# Altium PCB CANnode.PcbDoc
Units mil, origin at the board's own origin, x right, y up, seen from the top; angles counter-clockwise.
Board outline 3938 x 3086.48 mil, 2 copper layers (Top, Bottom), stack 61.811 mil thick; 245 components, 188 nets, 907 pads, 0 vias.
Unrouted connection lines stored in the file: 375.
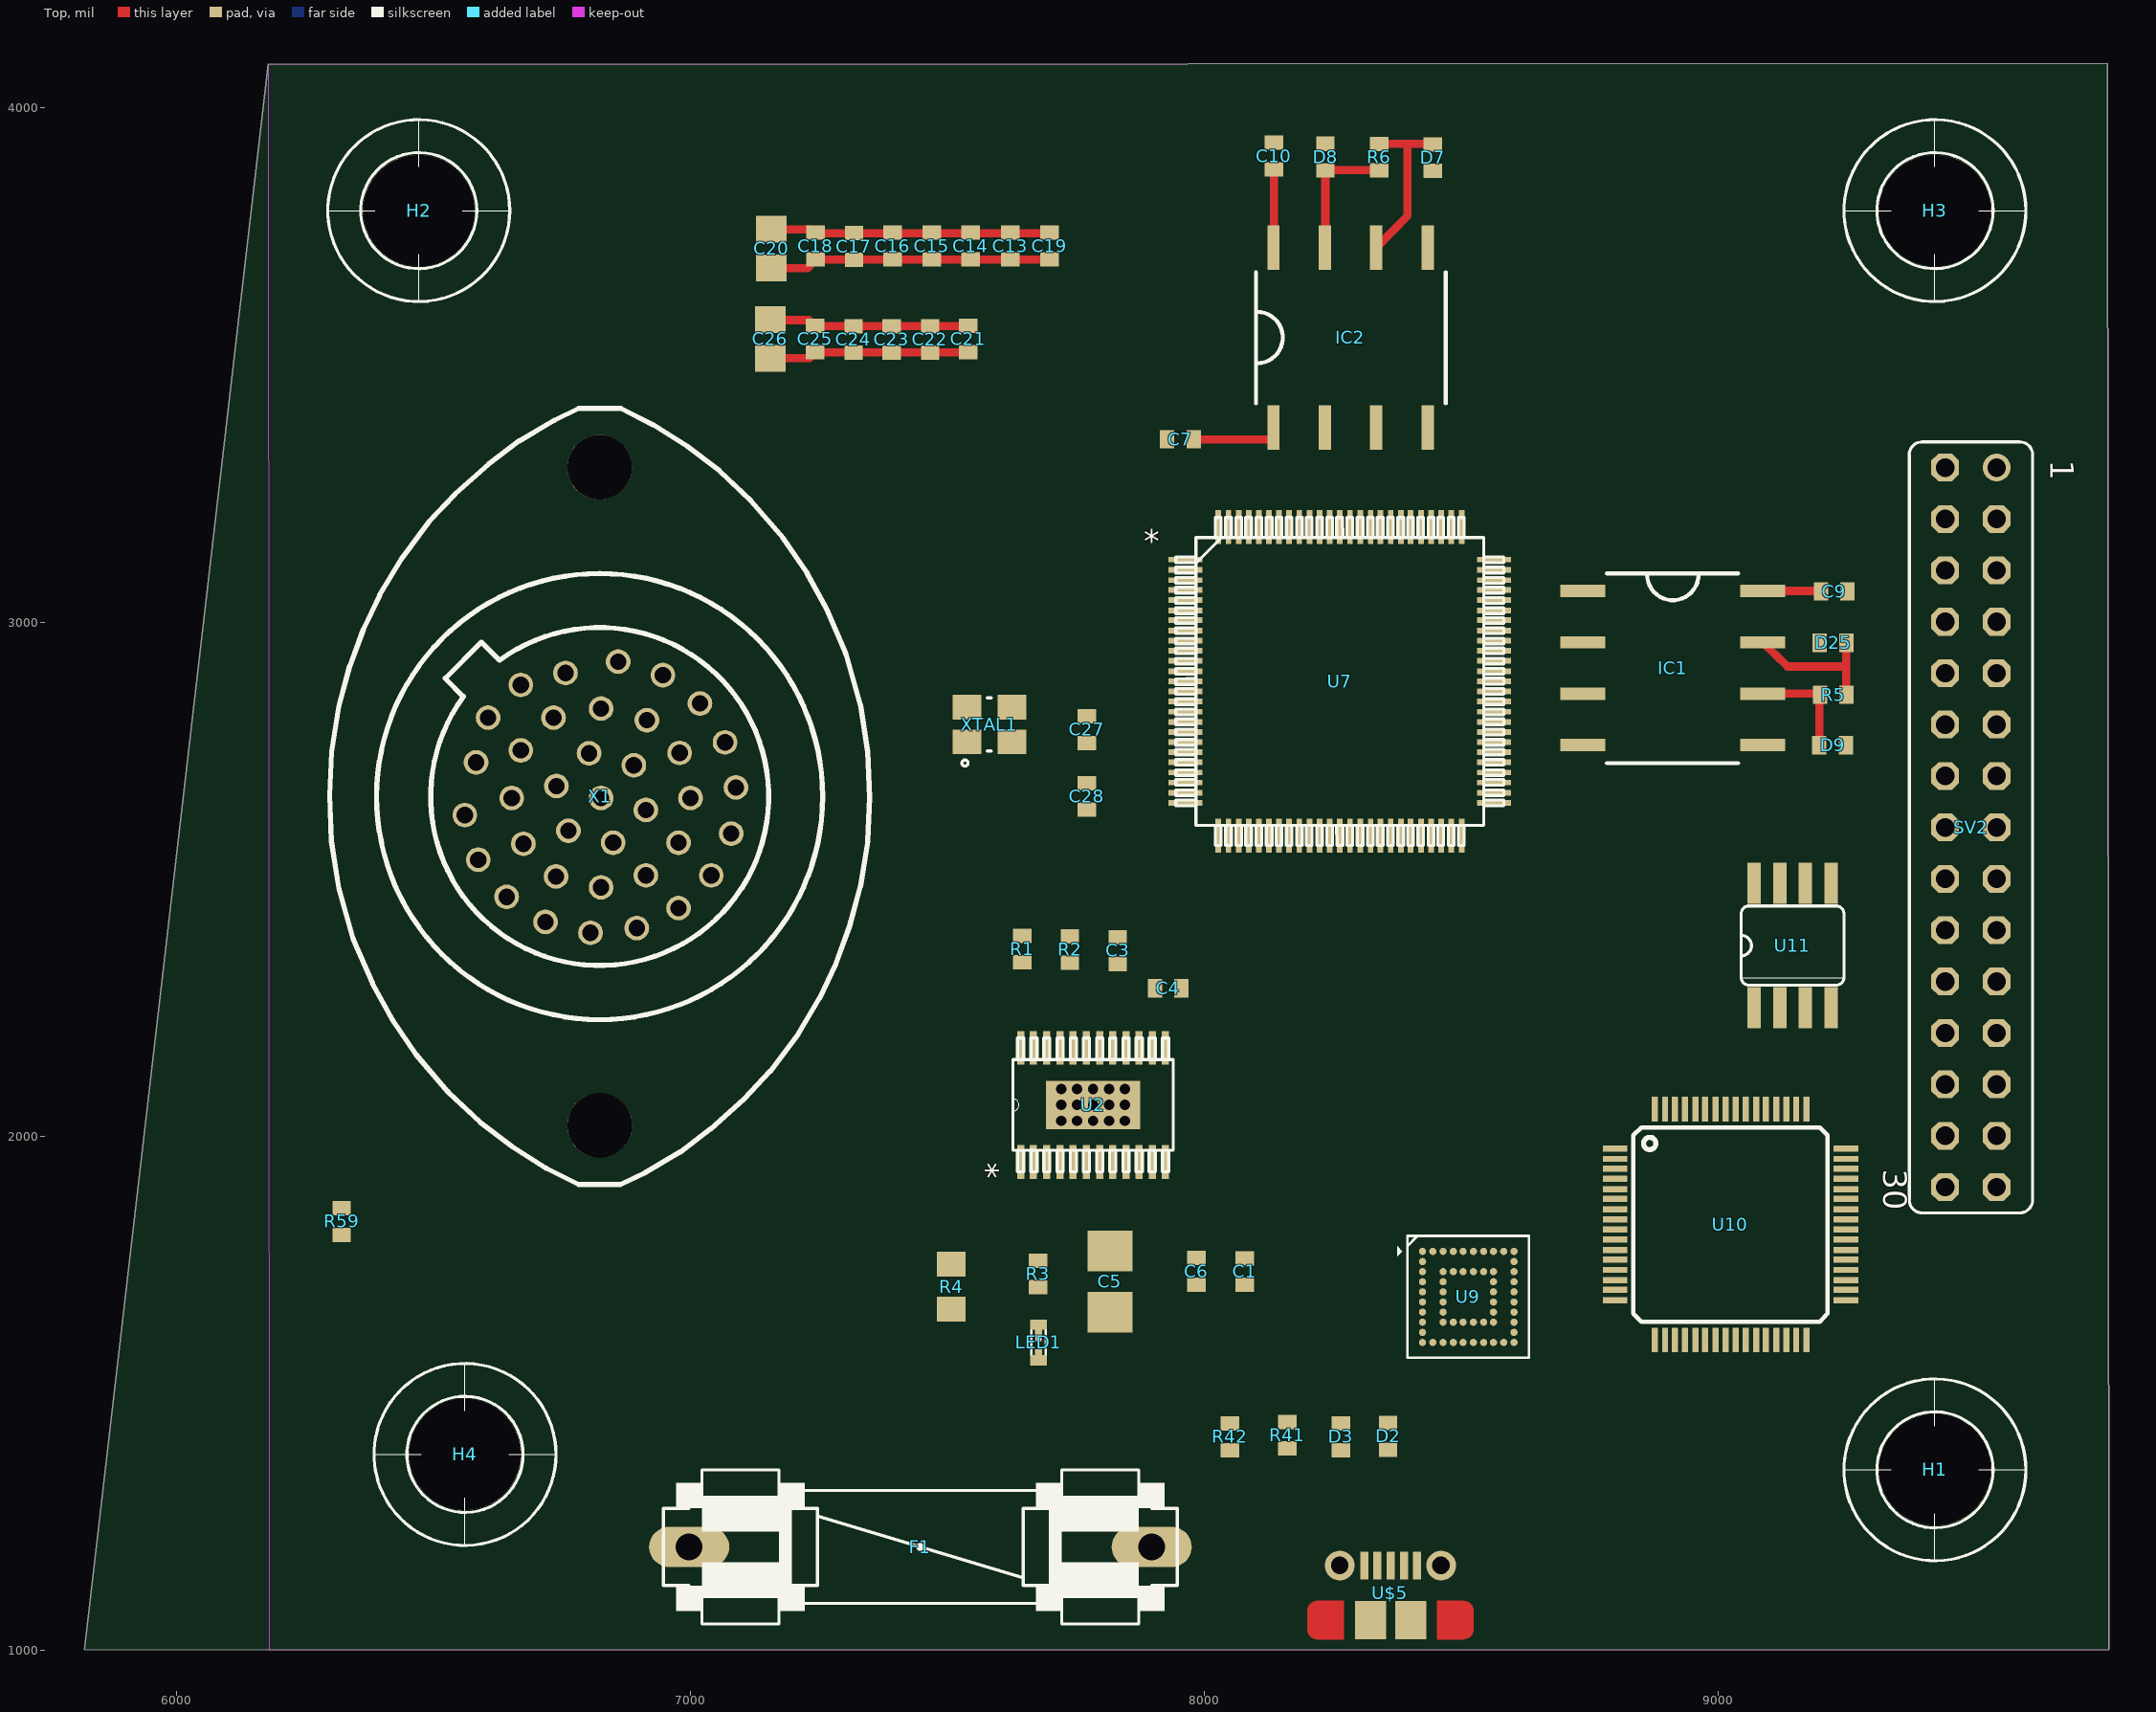
[diagram p0: Top view]
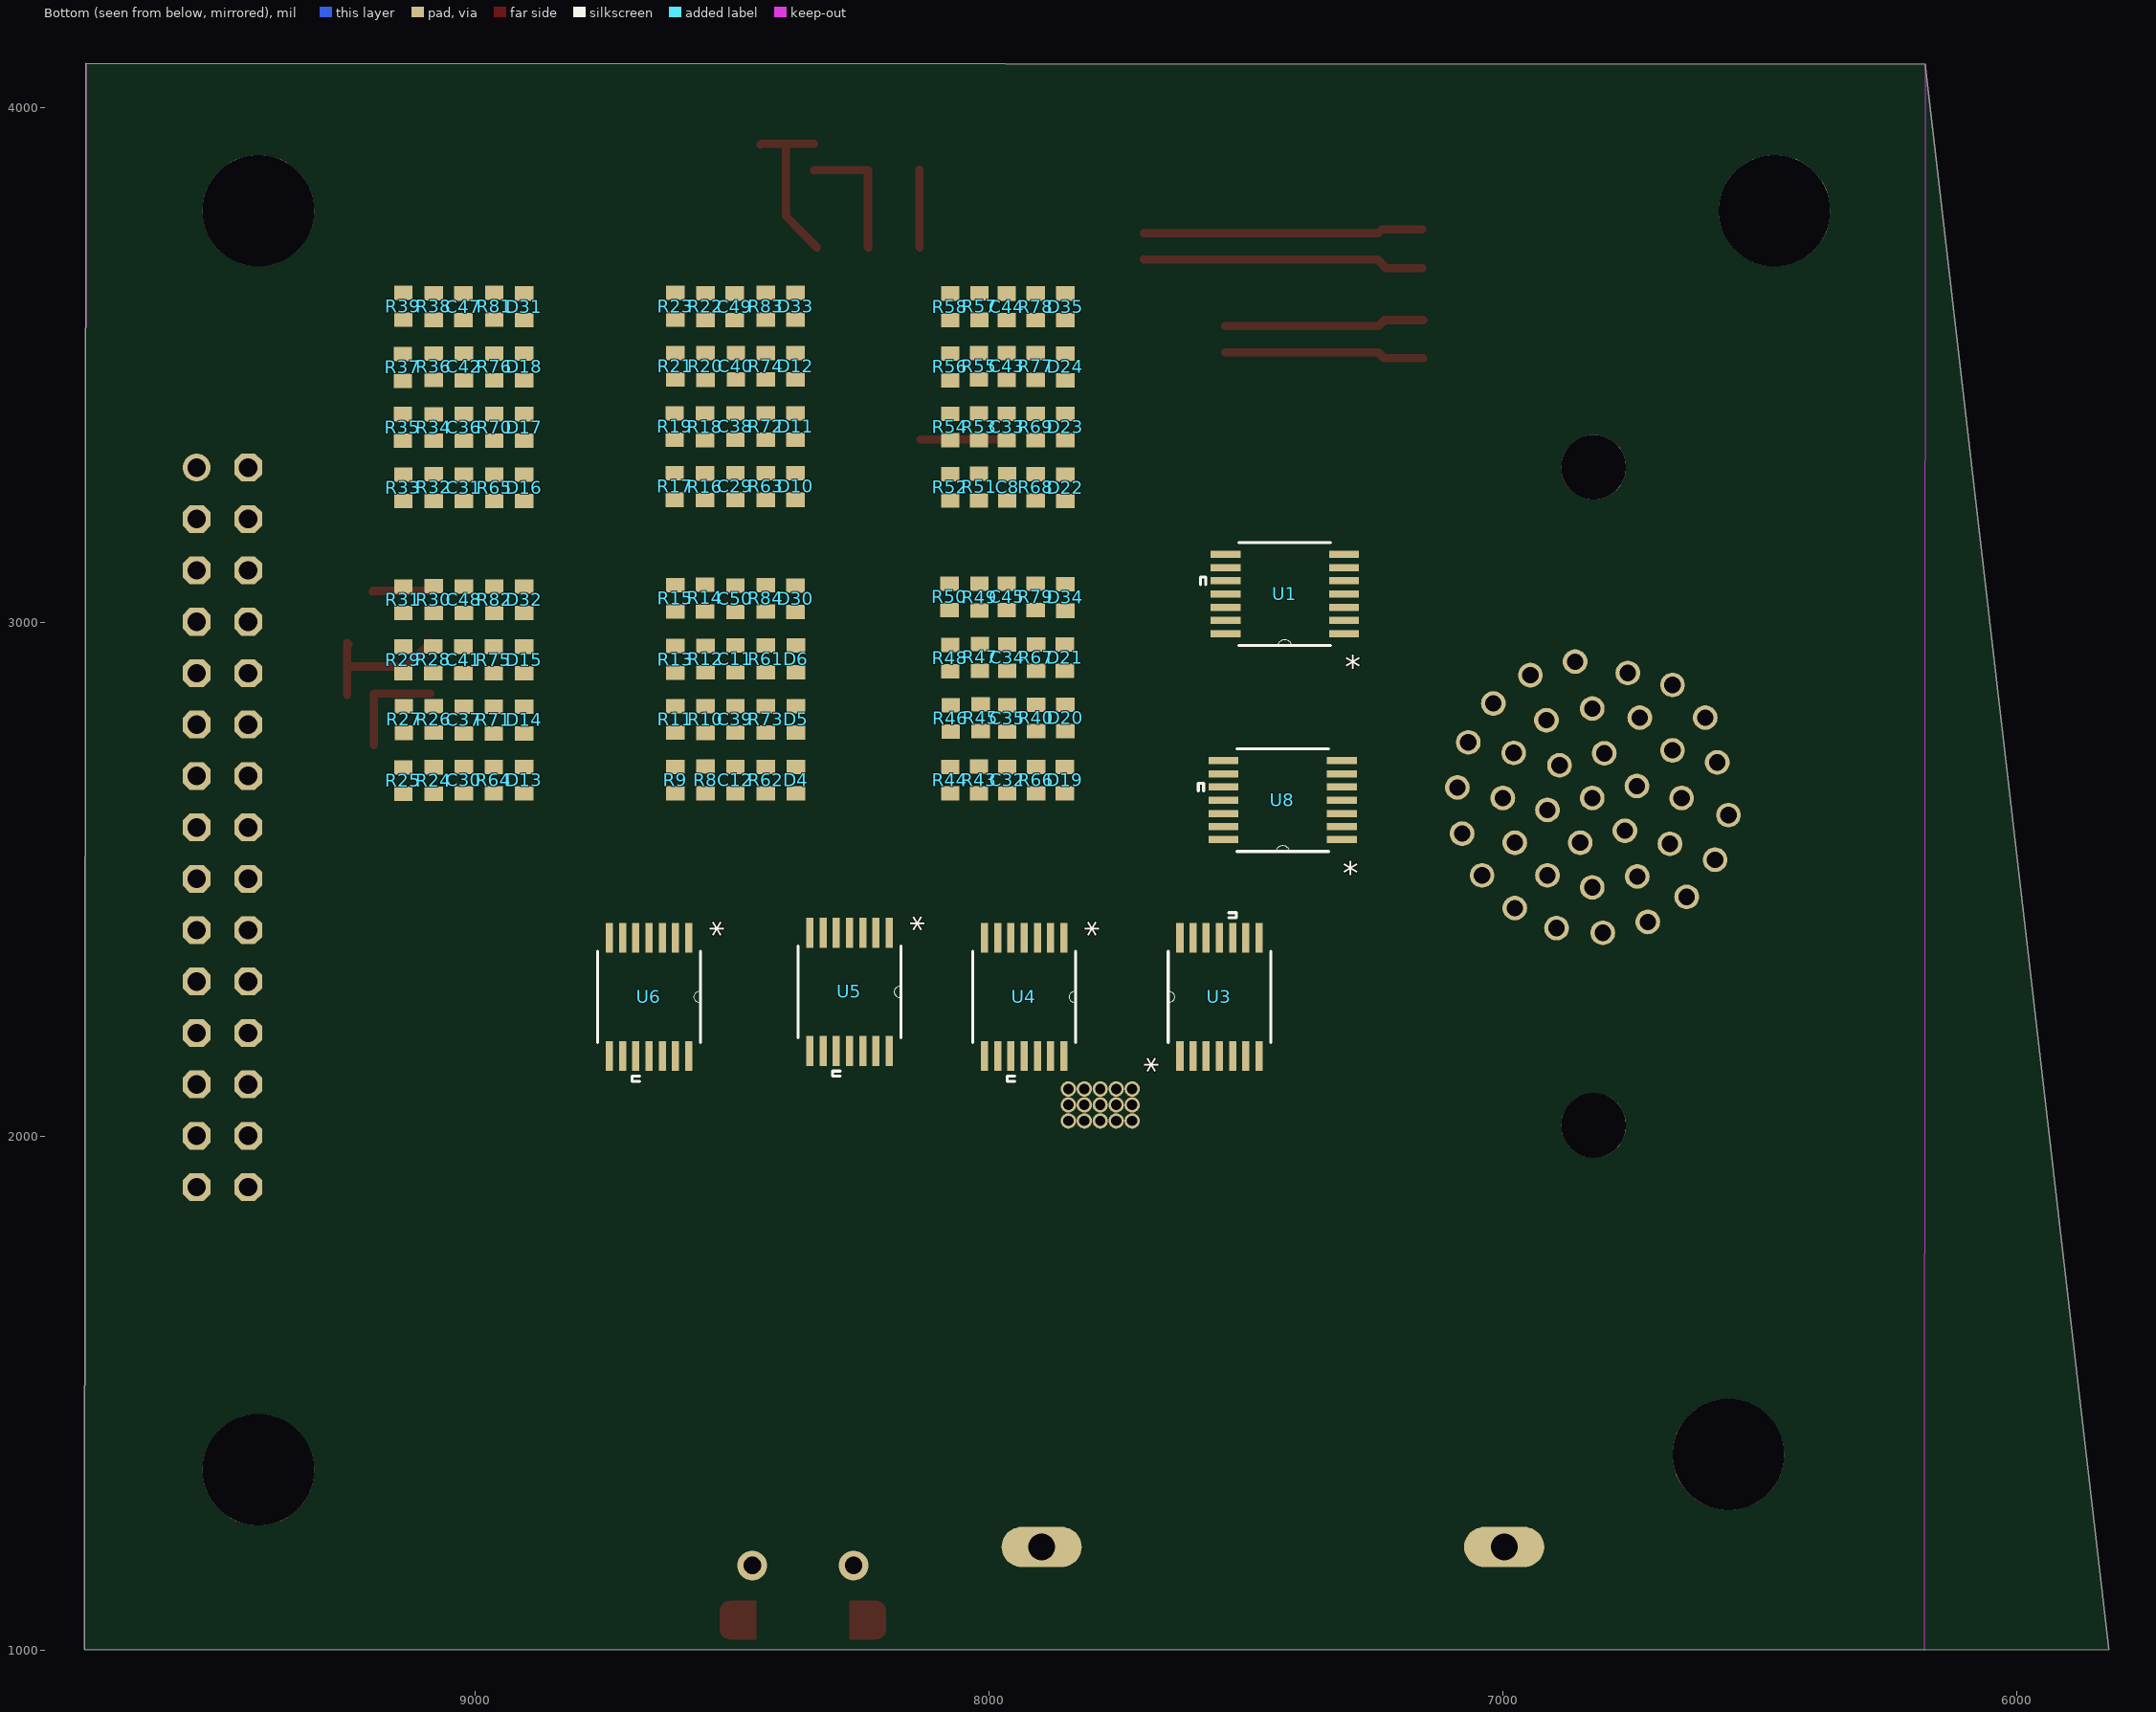
[diagram p1: Bottom view, seen from below]

## Layer stack, top to bottom
Top Solder: solder mask 0.4, Solder Resist, Dk 3.5
Top: signal copper 1.378
Dielectric 1: core 59.0551, FR-4, Dk 4.8
Bottom: signal copper 1.378
Bottom Solder: solder mask 0.4, Solder Resist, Dk 3.5

## Board outline
6180.65,1000 9759.65,1000.48 9757.65,4086.48 6178.65,4085.48 5821.65,1000.48

## Design rules (kind name [scope] priority, off if disabled: settings)
Clearance mdViaVia [IsVia vs IsVia] p1: gap=8
Clearance mdPadVia [IsPad vs IsVia] p2: gap=8
Clearance mdPadPad [IsPad vs IsPad] p3: gap=8
Clearance mdWireVia [(InLayerClass('Signal Layers') AND IsTrack) vs IsVia] p4: gap=8
Clearance mdWirePad [(InLayerClass('Signal Layers') AND IsTrack) vs IsPad] p5: gap=8
Clearance mdWireWire [(InLayerClass('Signal Layers') AND IsTrack) vs (InLayerClass('Signal Layers') AND IsTrack)] p6: gap=5
Clearance [All] p7: gap=5
HoleSize [All] p1: absolutevalues=TRUE maxlimit=100000 minlimit=8 maxpercent=80.000 minpercent=20.000
HoleToHoleClearance [All] p1: gap=8 allowstackedmicrovias=TRUE
PolygonConnect ThermalVias [IsVia] p1: connectstyle=Direct reliefconductorwidth=10 reliefentries=4 polygonreliefangle="90 Angle" airgapwidth=10
PolygonConnect [All] p2: connectstyle=Relief reliefconductorwidth=10 reliefentries=4 polygonreliefangle="90 Angle" airgapwidth=10
RoutingVias [All] p1: holewidth=28 width=50 viastyle="Through Hole" minholewidth=28 minwidth=50 maxholewidth=28 maxwidth=50
SilkToSilkClearance [All] p1 off: silktosilkclearance=10
SilkToSolderMaskClearance [IsPad] p1 off: minsilkscreentomaskgap=10 clearancetoexposedcopper=TRUE
SolderMaskExpansion [All] p1: expansion=4
Width [All] p1: maxlimit=100000 minlimit=5 preferedwidth=10
25 further rules are at their usual default settings.

## Components (designator, comment, footprint, x,y, rotation, side; value= is the part's Value field where it differs from the comment)
C1 "1uF" C0402 8078.65,1736.48 r270 top
C2 "1uF" C0402 5171.65,5950.48 r0 top
C3 "22uF" C0402 7831.65,2360.48 r90 top
C4 "47uF" C0402 7929.65,2287.48 r0 top
C5 "22uF" CT3528 7816.65,1716.48 r90 top
C6 "100nF" C0402 7984.65,1736.48 r90 top
C7 "" C0402 7953.65,3355.48 r180 top
C8 ".01uF" C0402 7964.65,3262.48 r270 bottom
C9 ".1uF" C0402 9225.65,3059.48 r0 top
C10 ".1uF" C0402 8135.65,3906.48 r90 top
C11 "1uF" C0402 8493.65,2928.48 r270 bottom
C12 "1uF" C0402 8493.65,2692.48 r270 bottom
C13 "100nF" C0402 7622.65,3731.48 r90 top
C14 "100nF" C0402 7545.65,3731.48 r90 top
C15 "100nF" C0402 7469.65,3731.48 r90 top
C16 "100nF" C0402 7393.65,3731.48 r90 top
C17 "100nF" C0402 7318.65,3730.48 r90 top
C18 "100nF" C0402 7243.65,3731.48 r90 top
C19 "100nF" C0402 7698.65,3731.48 r90 top
C20 "4.7uF" C0805 7157.65,3726.48 r90 top
C21 "100nF" C0402 7540.65,3550.48 r90 top
C22 "100nF" C0402 7466.65,3549.48 r90 top
C23 "100nF" C0402 7391.65,3549.48 r90 top
C24 "100nF" C0402 7317.65,3549.48 r90 top
C25 "100nF" C0402 7242.65,3550.48 r90 top
C26 "4.7uF" C0805 7155.65,3550.48 r90 top
C27 "22pF" C0402 7771.65,2790.48 r90 top
C28 "22pF" C0402 7771.65,2660.48 r90 top
C29 "1uF" C0402 8493.65,3263.48 r90 bottom
C30 "1uF" C0402 9021.65,2692.48 r270 bottom
C31 "1uF" C0402 9021.65,3261.48 r270 bottom
C32 ".01uF" C0402 7964.65,2692.48 r270 bottom
C33 ".01uF" C0402 7965.65,3379.48 r270 bottom
C34 ".01uF" C0402 7964.65,2930.48 r90 bottom
C35 ".01uF" C0402 7964.65,2812.48 r270 bottom
C36 "1uF" C0402 9021.65,3378.48 r90 bottom
C37 "1uF" C0402 9021.65,2809.48 r270 bottom
C38 "1uF" C0402 8493.65,3380.48 r270 bottom
C39 "1uF" C0402 8493.65,2810.48 r90 bottom
C40 "1uF" C0402 8492.65,3497.48 r90 bottom
C41 "1uF" C0402 9022.65,2926.48 r270 bottom
C42 "1uF" C0402 9021.65,3496.48 r270 bottom
C43 ".01uF" C0402 7965.65,3497.48 r270 bottom
C44 ".01uF" C0402 7965.65,3613.48 r270 bottom
C45 ".01uF" C0402 7965.65,3048.48 r90 bottom
C46 "" 0805 4821.65,5900.48 r0 top
C47 "1uF" C0402 9022.65,3613.48 r270 bottom
C48 "1uF" C0402 9021.65,3043.48 r270 bottom
C49 "1uF" C0402 8494.65,3613.48 r270 bottom
C50 "1uF" C0402 8493.65,3045.48 r270 bottom
C51 "" 0402 4221.65,6100.48 r0 top
C52 "" 0402 4021.65,6100.48 r0 top
C53 "" 0402 3821.65,6100.48 r0 top
C54 "" 0402 3621.65,6100.48 r0 top
C55 "" 0402 3421.65,6100.48 r0 top
C56 "" 0805 4571.65,5900.48 r0 top
C57 "" 0805 4321.65,5900.48 r0 top
C58 "" 0805 4071.65,5900.48 r0 top
C59 "" 0805 3821.65,5900.48 r0 top
C60 "" 0402 3221.65,6100.48 r0 top
C61 "" 0402 3021.65,6100.48 r0 top
C62 "" 0402 2821.65,6100.48 r0 top
C63 "" 0402 2621.65,6100.48 r0 top
C64 "" 0402 2421.65,6100.48 r0 top
C65 "" 0402 2221.65,6100.48 r0 top
C66 "" 0402 2021.65,6100.48 r0 top
C67 "" 0402 1821.65,6100.48 r0 top
C68 "" 0402 1621.65,6100.48 r0 top
C69 "" 0402 1421.65,6100.48 r0 top
C70 "" 0402 1221.65,6100.48 r0 top
C71 "" 0402 1021.65,6100.48 r0 top
C72 "" 0402 5271.65,6250.48 r0 top
D2 "TVS DIODE" R0402 8357.65,1415.48 r90 top
D3 "TVS DIODE" R0402 8265.65,1414.48 r90 top
D4 "TVS DIODE" R0402 8375.65,2692.48 r270 bottom
D5 "TVS DIODE" R0402 8375.65,2810.48 r90 bottom
D6 "TVS DIODE" R0402 8375.65,2928.48 r270 bottom
D7 "TVS DIODE" R0402 8444.65,3903.48 r90 top
D8 "TVS DIODE" R0402 8235.65,3904.48 r90 top
D9 "TVS DIODE" R0402 9222.65,2760.48 r180 top
D10 "TVS DIODE" R0402 8376.65,3263.48 r90 bottom
D11 "TVS DIODE" R0402 8376.65,3380.48 r270 bottom
D12 "TVS DIODE" R0402 8376.65,3497.48 r90 bottom
D13 "TVS DIODE" R0402 8904.65,2692.48 r270 bottom
D14 "TVS DIODE" R0402 8904.65,2809.48 r270 bottom
D15 "TVS DIODE" R0402 8904.65,2926.48 r270 bottom
D16 "TVS DIODE" R0402 8904.65,3261.48 r270 bottom
D17 "TVS DIODE" R0402 8904.65,3378.48 r90 bottom
D18 "TVS DIODE" R0402 8904.65,3496.48 r270 bottom
D19 "TVS DIODE" R0402 7852.65,2692.48 r270 bottom
D20 "TVS DIODE" R0402 7851.65,2813.48 r270 bottom
D21 "TVS DIODE" R0402 7852.65,2930.48 r90 bottom
D22 "TVS DIODE" R0402 7851.65,3261.48 r270 bottom
D23 "TVS DIODE" R0402 7851.65,3379.48 r270 bottom
D24 "TVS DIODE" R0402 7851.65,3496.48 r270 bottom
D25 "TVS DIODE" R0402 9223.65,2959.48 r180 top
D26 "Blue" LED0805 4821.65,3900.48 r0 top
D27 "Blue" LED0805 4621.65,3900.48 r0 top
D28 "Blue" LED0805 4421.65,3900.48 r0 top
D29 "Blue" LED0805 4221.65,3900.48 r0 top
D30 "TVS DIODE" R0402 8376.65,3045.48 r270 bottom
D31 "TVS DIODE" R0402 8904.65,3613.48 r270 bottom
D32 "TVS DIODE" R0402 8904.65,3043.48 r270 bottom
D33 "TVS DIODE" R0402 8376.65,3614.48 r270 bottom
D34 "TVS DIODE" R0402 7851.65,3047.48 r90 bottom
D35 "TVS DIODE" R0402 7851.65,3613.48 r270 bottom
F1 "" FUSE 7447.65,1200.48 r0 top
FB1 "" 0805 3571.65,5900.48 r0 top
FB2 "" 0805 3321.65,5900.48 r0 top
H1 "" 5,5 9421.65,1350.48 r0 top
H2 "" 5,5 6471.65,3800.48 r0 top
H3 "" 5,5 9421.65,3800.48 r0 top
H4 "" 5,5 6561.65,1380.48 r0 top
IC1 "ISO1050DUB" DUB-R-PDSO-G8 8911.65,2910.48 r270 top
IC2 "ISO1050DUB" DUB-R-PDSO-G8 8284.65,3553.48 r0 top
LED1 "" SMARTLED-TTW 7677.65,1598.48 r180 top
Q1 "FDV302P" SOT-23 2071.65,3450.48 r0 top
Q3 "FDV302P" SOT-23 1721.65,3450.48 r0 top
R1 "250k" R0402 7645.65,2363.48 r90 top
R2 "250k" R0402 7738.65,2362.48 r90 top
R3 "499k" R0402 7676.65,1731.48 r90 top
R4 "VARISTORCN0805" CT/CN0805 7507.65,1706.48 r90 top
R5 "DNP" R0402 9223.65,2858.48 r0 top
R6 "DNP" R0402 8340.65,3904.48 r270 top
R7 "100k" R0402 1371.65,4150.48 r0 top
R8 "20.1K" R0402 8551.65,2692.48 r90 bottom
R9 "39K" R0402 8610.65,2692.48 r270 bottom
R10 "20.1k" R0402 8551.65,2810.48 r270 bottom
R11 "39K" R0402 8610.65,2810.48 r90 bottom
R12 "20.1k" R0402 8551.65,2927.48 r90 bottom
R13 "39K" R0402 8610.65,2927.48 r270 bottom
R14 "20.1k" R0402 8552.65,3046.48 r90 bottom
R15 "39K" R0402 8610.65,3046.48 r270 bottom
R16 "20.1k" R0402 8552.65,3263.48 r270 bottom
R17 "39K" R0402 8611.65,3263.48 r90 bottom
R18 "20.1k" R0402 8552.65,3379.48 r90 bottom
R19 "39K" R0402 8611.65,3380.48 r270 bottom
R20 "20.1k" R0402 8551.65,3497.48 r270 bottom
R21 "39K" R0402 8610.65,3497.48 r90 bottom
R22 "20.1k" R0402 8551.65,3613.48 r90 bottom
R23 "39K" R0402 8610.65,3614.48 r270 bottom
R24 "20.1k" R0402 9080.65,2691.48 r90 bottom
R25 "39K" R0402 9139.65,2691.48 r270 bottom
R26 "20.1k" R0402 9080.65,2810.48 r90 bottom
R27 "39K" R0402 9138.65,2810.48 r270 bottom
R28 "20.1k" R0402 9081.65,2926.48 r90 bottom
R29 "39K" R0402 9139.65,2926.48 r270 bottom
R30 "20.1k" R0402 9080.65,3043.48 r90 bottom
R31 "39K" R0402 9139.65,3043.48 r270 bottom
R32 "20.1k" R0402 9080.65,3261.48 r90 bottom
R33 "39K" R0402 9139.65,3261.48 r270 bottom
R34 "20.1k" R0402 9080.65,3378.48 r270 bottom
R35 "39K" R0402 9140.65,3378.48 r90 bottom
R36 "20.1k" R0402 9080.65,3496.48 r90 bottom
R37 "39K" R0402 9140.65,3495.48 r270 bottom
R38 "20.1k" R0402 9080.65,3613.48 r90 bottom
R39 "39K" R0402 9139.65,3614.48 r270 bottom
R40 "1k" R0402 7908.65,2813.48 r270 bottom
R41 "22" R0402 8161.65,1417.48 r90 top
R42 "22" R0402 8049.65,1414.48 r90 top
R43 "20.1k" R0402 8019.65,2692.48 r90 bottom
R44 "39K" R0402 8075.65,2692.48 r270 bottom
R45 "20.1k" R0402 8016.65,2813.48 r90 bottom
R46 "39K" R0402 8074.65,2812.48 r270 bottom
R47 "20.1k" R0402 8017.65,2931.48 r270 bottom
R48 "39K" R0402 8075.65,2929.48 r90 bottom
R49 "20.1k" R0402 8018.65,3048.48 r270 bottom
R50 "39K" R0402 8076.65,3048.48 r90 bottom
R51 "20.1k" R0402 8019.65,3262.48 r90 bottom
R52 "39K" R0402 8075.65,3262.48 r270 bottom
R53 "20.1k" R0402 8019.65,3379.48 r90 bottom
R54 "39K" R0402 8075.65,3379.48 r270 bottom
R55 "20.1k" R0402 8019.65,3497.48 r90 bottom
R56 "39K" R0402 8075.65,3496.48 r270 bottom
R57 "20.1k" R0402 8018.65,3613.48 r90 bottom
R58 "39K" R0402 8075.65,3613.48 r270 bottom
R59 "DNP" R0402 6321.65,1833.48 r90 top
R61 "698" R0402 8434.65,2928.48 r270 bottom
R62 "698" R0402 8434.65,2692.48 r270 bottom
R63 "698" R0402 8434.65,3263.48 r90 bottom
R64 "698" R0402 8963.65,2692.48 r270 bottom
R65 "698" R0402 8962.65,3261.48 r270 bottom
R66 "1k" R0402 7908.65,2692.48 r270 bottom
R67 "1k" R0402 7908.65,2930.48 r90 bottom
R68 "1k" R0402 7909.65,3262.48 r270 bottom
R69 "1k" R0402 7909.65,3379.48 r270 bottom
R70 "698" R0402 8962.65,3378.48 r90 bottom
R71 "698" R0402 8963.65,2809.48 r270 bottom
R72 "698" R0402 8434.65,3380.48 r270 bottom
R73 "698" R0402 8434.65,2810.48 r90 bottom
R74 "698" R0402 8434.65,3497.48 r90 bottom
R75 "698" R0402 8963.65,2926.48 r270 bottom
R76 "698" R0402 8962.65,3496.48 r270 bottom
R77 "1k" R0402 7909.65,3497.48 r270 bottom
R78 "1k" R0402 7909.65,3613.48 r270 bottom
R79 "1k" R0402 7909.65,3048.48 r90 bottom
R81 "698" R0402 8962.65,3614.48 r270 bottom
R82 "698" R0402 8962.65,3043.48 r270 bottom
R83 "698" R0402 8434.65,3614.48 r270 bottom
R84 "698" R0402 8434.65,3046.48 r270 bottom
R86 "" 0402 5071.65,6250.48 r0 top
R89 "" 0402 4871.65,6250.48 r0 top
R90 "" 0402 4671.65,6250.48 r0 top
R91 "" 0402 4471.65,6250.48 r0 top
R92 "" 0402 4271.65,6250.48 r0 top
R93 "" 0402 4071.65,6250.48 r0 top
R94 "" 0402 3871.65,6250.48 r0 top
R95 "" 0402 3671.65,6250.48 r0 top
R96 "" 0402 3471.65,6250.48 r0 top
R97 "" 0402 3271.65,6250.48 r0 top
R98 "" 0402 3071.65,6250.48 r0 top
R99 "" 0402 2871.65,6250.48 r0 top
R100 "" 0402 3071.65,5900.48 r0 top
R101 "" 0402 2871.65,5900.48 r0 top
R102 "" 0402 2671.65,5900.48 r0 top
R103 "" 0402 2471.65,5900.48 r0 top
R104 "" 0402 2271.65,5900.48 r0 top
R105 "" 0402 2071.65,5900.48 r0 top
R106 "" 0402 1871.65,5900.48 r0 top
R107 "" 0402 1671.65,5900.48 r0 top
R108 "" 0402 1471.65,5900.48 r0 top
R109 "" 0402 1271.65,5900.48 r0 top
R110 "" 0402 1071.65,5900.48 r0 top
R111 "" 0402 5221.65,6100.48 r0 top
R112 "" 0402 5021.65,6100.48 r0 top
R113 "" 0402 4821.65,6100.48 r0 top
R114 "" 0402 4621.65,6100.48 r0 top
R115 "" 0402 4421.65,6100.48 r0 top
SV2 "" FE15-2 9491.65,2600.48 r270 top
TP1 "TPSB1,27" B1,27 4971.65,5900.48 r0 top
U1 "LM324PW" SOP65P640X120-14N 7424.65,3054.48 r0 bottom
U2 "TPS70445_PWP_24" PWP24_4P68X2P4 7783.65,2060.48 r90 top
U3 "LM324PW" SOP65P640X120-14N 7551.65,2270.48 r90 bottom
U4 "LM324PW" SOP65P640X120-14N 7931.65,2270.48 r270 bottom
U5 "LM324PW" SOP65P640X120-14N 8271.65,2280.48 r270 bottom
U6 "LM324PW" SOP65P640X120-14N 8661.65,2270.48 r270 bottom
U7 "RM42L432_PZ_100RM42L432_PZ_100" PZ100 8263.65,2884.48 r0 top
U8 "LM324PW" SOP65P640X120-14N 7428.65,2653.48 r0 bottom
U9 "" CP56 8424.65,1775.48 r0 top
U10 "FT2232HL" LQFP64 8851.65,1642.48 r0 top
U11 "93LC56C-I/SN" SO8 9044.65,2470.48 r0 top
U$5 "" USB-MICRO-MOLEX-105017-0001 8263.65,1164.48 r0 top
X1 "AS14-35" AS14-35 6823.65,2660.48 r45 top
XTAL1 "7M-16.000MAAJ-T" TXC_7M-16.000MAAJ-T 7581.65,2800.48 r0 top
Y1 "12M" CRYSTAL_3225 5021.65,3900.48 r0 top

## Footprints (in the part's own frame and the unit in brackets; to place one, negate y for a bottom-side part, rotate by r counter-clockwise, add the part's x,y. Pads: shape width x height; smd on the part's side, far side on the other; paste and mask are expansions set on the pad)
5,5 [mil] "5,5"
  round 217 hole 217: 1(0,0)
  silkscreen extent -177,-177 177,177
0402 [mil] "0402"
  rect 22x26 smd: 1(-21.65,0) 2(22,0)
  silkscreen extent -39,-20 40,20
0805 [mil] "0805"
  rect 40x56 smd: 1(-39.37,0) 2(40,0)
  silkscreen extent -65,-33 65,34
AS14-35 [mil] "AS14-35"
  round 126 hole 126: 1(-452.5,-452.5) 1(453,453)
  round 48 hole 32: 1(45,262) 2(123,217) 3(211,160) 4(254,80) 5(266,-10) 6(247,-98) 7(200,-175) 8(130,-232) 9(45,-262) 10(-45,-262) 11(-130,-232) 12(-200,-175) 13(-247,-98) 14(-266,-10) 15(-254,80) 16(-211,160) 17(-123,217) 18(-45,262) 19(45,172) 20(123,119) 21(170,40) 22(170,-50) 23(123,-127) 24(45,-172) 25(-45,-172) 26(-123,-127) 27(-170,-50) 28(-170,40) 29(-123,119) 30(-45,172) 31(45,74) 32(90,-4) 33(45,-82) 34(-45,-82) 35(-90,-4) 36(-45,74) 37(0,-4)
  silkscreen extent -615,-615 615,615
B1,27 [mil] "B1,27"
  rrect100% 50x50 smd: TP(0,0)
C0402 [mil] "C0402"
  rect 28x36 smd: 1(-25.59,0) 2(26,0)
C0805 [mil] "C0805"
  rect 52x60 smd: 1(-37.4,0) 2(38,0)
CP56 [mil] "CP56"
  rrect100% 14x14 smd: A1(0,0) A2(20,0) A3(40,0) A4(60,0) A5(79,0) A6(99,0) A7(119,0) A8(138,0) A9(158,0) A10(178,0) B1(0,-19.68) B10(178,-19.68) C1(0,-39.37) C3(40,-39.37) C4(60,-39.37) C5(79,-39.37) C6(99,-39.37) C7(119,-39.37) C8(138,-39.37) C10(178,-39.37) D1(0,-59.06) D3(40,-59.06) D8(138,-59.06) D10(178,-59.06) E1(0,-78.74) E3(40,-78.74) E8(138,-78.74) E10(178,-78.74) F1(0,-98.43) F3(40,-98.43) F8(138,-98.43) F10(178,-98.43) G1(0,-118.11) G3(40,-118.11) G8(138,-118.11) G10(178,-118.11) H1(0,-137.8) H3(40,-137.8) H4(60,-137.8) H5(79,-137.8) H6(99,-137.8) H7(119,-137.8) H8(138,-137.8) H10(178,-137.8) J1(0,-157.48) J10(178,-157.48) K1(0,-177.17) K2(20,-177.17) K3(40,-177.17) K4(60,-177.17) K5(79,-177.17) K6(99,-177.17) K7(119,-177.17) K8(138,-177.17) K9(158,-177.17) K10(178,-177.17)
  silkscreen extent -49,-207 207,30
CRYSTAL_3225 [mil] "CRYSTAL_3225"
  rect 52x48 smd: P$1(-39.37,-31.5) P$2(40,-31.5) P$3(40,32) P$4(-39.37,32)
  silkscreen extent -67,-55 67,56
CT3528 [mil] "CT3528"
  rect 79x87 smd: +(-59.06,0) -(60,0)
CT/CN0805 [mil] "CT/CN0805"
  rect 48x56 smd: 1(-43.31,0) 2(44,0)
DUB-R-PDSO-G8 [mil] "DUB-R-PDSO-G8"
  rect 24x87 smd: 1(-150,-175) 2(-50,-175) 3(50,-175) 4(150,-175) 5(150,175) 6(50,175) 7(-50,175) 8(-150,175)
  silkscreen extent -184,-128 185,127
FE15-2 [mil] "FE15-2"
  round 54 hole 36: 1(-700,50)
  oct 54x54 hole 36: 2(-700,-50) 3(-600,50) 4(-600,-50) 5(-500,50) 6(-500,-50) 7(-400,50) 8(-400,-50) 9(-300,50) 10(-300,-50) 11(-200,50) 12(-200,-50) 13(-100,50) 14(-100,-50) 15(0,50) 16(0,-50) 17(100,50) 18(100,-50) 19(200,50) 20(200,-50) 21(300,50) 22(300,-50) 23(400,50) 24(400,-50) 25(500,50) 26(500,-50) 27(600,50) 28(600,-50) 29(700,50) 30(700,-50)
  silkscreen extent -750,-120 750,120
FUSE [mil] "FUSE"
  oval 156x78 hole 52: 1(-450,0) 2(450,0)
  silkscreen extent -500,-150 500,150
LED0805 [mil] "LED0805"
  rect 40x48 smd: A(42,4) C(-33.4,4)
  silkscreen extent -73,-27 67,36
LQFP64 [mil] "LQFP64"
  rect 48x12 smd: 1(-52.41,333) 2(-52.41,313) 3(-52.41,294) 4(-52.41,274) 5(-52.41,254) 6(-52.41,235) 7(-52.41,215) 8(-52.41,195) 9(-52.41,176) 10(-52.41,156) 11(-52.41,136) 12(-52.41,117) 13(-52.41,97) 14(-52.41,77) 15(-52.41,58) 16(-52.41,38) 33(397,38) 34(397,58) 35(397,77) 36(397,97) 37(397,117) 38(397,136) 39(397,156) 40(397,176) 41(397,195) 42(397,215) 43(397,235) 44(397,254) 45(397,274) 46(397,294) 47(397,313) 48(397,333)
  rect 12x48 smd: 17(25,-39.41) 18(45,-39.41) 19(64,-39.41) 20(84,-39.41) 21(104,-39.41) 22(123,-39.41) 23(143,-39.41) 24(163,-39.41) 25(182,-39.41) 26(202,-39.41) 27(222,-39.41) 28(241,-39.41) 29(261,-39.41) 30(281,-39.41) 31(300,-39.41) 32(320,-39.41) 49(320,410) 50(300,410) 51(281,410) 52(261,410) 53(241,410) 54(222,410) 55(202,410) 56(182,410) 57(163,410) 58(143,410) 59(123,410) 60(104,410) 61(84,410) 62(64,410) 63(45,410) 64(25,410)
  silkscreen extent -17,-4 361,374
PWP24_4P68X2P4 [mil] "PWP24_4P68X2P4"
  rect 66x14 smd: 1(-111,141) 2(-111,116) 3(-111,90) 4(-111,64) 5(-111,39) 6(-111,13) 7(-111,-12.8) 8(-111,-38.39) 9(-111,-63.98) 10(-111,-89.57) 11(-111,-115.16) 12(-111,-140.75) 13(111,-140.75) 14(111,-115.16) 15(111,-89.57) 16(111,-63.98) 17(111,-38.39) 18(111,-12.8) 19(111,13) 20(111,39) 21(111,64) 22(111,90) 23(111,116) 24(111,141)
  rect 94x184 smd: EPAD(0,0)
  round 30 hole 20: V(-31,-62) V_1(-31,-31) V_2(-31,0) V_3(-31,31) V_4(-31,62) V_5(0,-62) V_6(0,-31) V_7(0,0) V_8(0,31) V_9(0,62) V_10(31,-62) V_11(31,-31) V_12(31,0) V_13(31,31) V_14(31,62)
  silkscreen extent -130,-156 130,156
PZ100 [mil] "PZ100"
  rect 66x11 smd: 1(-300,237) 2(-300,217) 3(-300,197) 4(-300,178) 5(-300,158) 6(-300,138) 7(-300,119) 8(-300,99) 9(-300,79) 10(-300,60) 11(-300,40) 12(-300,20) 13(-300,0) 14(-300,-19.69) 15(-300,-39.37) 16(-300,-59.06) 17(-300,-78.74) 18(-300,-98.43) 19(-300,-118.11) 20(-300,-137.8) 21(-300,-157.48) 22(-300,-177.17) 23(-300,-196.85) 24(-300,-216.53) 25(-300,-236.22) 51(300,-236.22) 52(300,-216.53) 53(300,-196.85) 54(300,-177.17) 55(300,-157.48) 56(300,-137.8) 57(300,-118.11) 58(300,-98.43) 59(300,-78.74) 60(300,-59.06) 61(300,-39.37) 62(300,-19.69) 63(300,0) 64(300,20) 65(300,40) 66(300,60) 67(300,79) 68(300,99) 69(300,119) 70(300,138) 71(300,158) 72(300,178) 73(300,197) 74(300,217) 75(300,237)
  rect 11x66 smd: 26(-236.22,-300) 27(-216.53,-300) 28(-196.85,-300) 29(-177.16,-300) 30(-157.48,-300) 31(-137.8,-300) 32(-118.11,-300) 33(-98.43,-300) 34(-78.74,-300) 35(-59.06,-300) 36(-39.37,-300) 37(-19.68,-300) 38(0,-300) 39(20,-300) 40(40,-300) 41(60,-300) 42(79,-300) 43(99,-300) 44(119,-300) 45(138,-300) 46(158,-300) 47(178,-300) 48(197,-300) 49(217,-300) 50(237,-300) 76(237,300) 77(217,300) 78(197,300) 79(178,300) 80(158,300) 81(138,300) 82(119,300) 83(99,300) 84(79,300) 85(60,300) 86(40,300) 87(20,300) 88(0,300) 89(-19.68,300) 90(-39.37,300) 91(-59.06,300) 92(-78.74,300) 93(-98.43,300) 94(-118.11,300) 95(-137.8,300) 96(-157.48,300) 97(-177.16,300) 98(-196.85,300) 99(-216.53,300) 100(-236.22,300)
  silkscreen extent -319,-319 319,319
R0402 [mil] "R0402"
  rect 28x36 smd: 1(-25.59,0) 2(26,0)
SMARTLED-TTW [mil] "SMARTLED-TTW"
  rect 32x20 smd: A(0,-34.45) C(0,35)
  rect 14x14 smd: A@1(0,-19.68) C@1(0,20)
  silkscreen extent -14,-24 14,24
SO8 [mil] "SO8"
  rect 26x80 smd: 1(25,-221) 2(75,-221) 3(125,-221) 4(175,-221) 5(175,21) 6(125,21) 7(75,21) 8(25,21)
  silkscreen extent 0,-177 200,-23
SOP65P640X120-14N [mil] "SOP65P640X120-14N"
  rect 58x14 smd: 1(-115,77) 2(-115,51) 3(-115,26) 4(-115,0) 5(-115,-26) 6(-115,-51) 7(-115,-77) 8(115,-77) 9(115,-51) 10(115,-26) 11(115,0) 12(115,26) 13(115,51) 14(115,77)
  silkscreen extent -89,-100 164,100
SOT-23 [mil] "SOT-23"
  rect 31x35 smd: 1(1,-40) 2(-37,40) 3(39,40)
  silkscreen extent -56,-15 58,15
TXC_7M-16.000MAAJ-T [mil] "TXC_7M-16.000MAAJ-T"
  rect 56x48 smd: 1(-43.31,-33.46) 2(44,-33.46) 3(44,34) 4(-43.31,34)
  silkscreen extent -53,-81 4,52
USB-MICRO-MOLEX-105017-0001 [mil] "USB-MICRO-MOLEX-105017-0001"
  rect 16x54 smd: 1(48,0) 2(73,0) 3(99,0) 4(125,0) 5(150,0)
  round 58 hole 34: P$1(0,0) P$2(197,0)
  rect 60x75 smd: P$3(138,-106.3) P$4(60,-106.3)
  Top region: 189,-143.7 189,-68.9 241,-68.9 248.38,-70.5 254.58,-74.81 258.66,-81.15 260,-88.58 260,-88.58 260,-124.02 258.66,-131.44 254.58,-137.79 248.38,-142.1 241,-143.7 241,-143.7
  Top region: 8,-68.9 8,-143.7 -43.31,-143.7 -50.84,-142.2 -57.23,-137.94 -61.49,-131.55 -62.99,-124.02 -62.99,-124.02 -62.99,-88.58 -61.49,-81.05 -57.23,-74.66 -50.84,-70.4 -43.31,-68.9 -43.31,-68.9

## Part data
C1 C2 C3 C4 C6 C7 C8 C9 C10 C11 C12 C13 C14 C15 C16 C17 C18 C19 C21 C22 C23 C24 C25 C27 C28 C29 C30 C31 C32 C33 C34 C35 C36 C37 C38 C39 C40 C41 C42 C43 C44 C45 C47 C48 C49 C50: library part C0402
C5: library part CT3528
C20 C26: library part C0805
C46 C56 C57 C58 C59 FB1 FB2: library part 0805
C51 C52 C53 C54 C55 C60 C61 C62 C63 C64 C65 C66 C67 C68 C69 C70 C71 C72 R86 R89 R90 R91 R92 R93 R94 R95 R96 R97 R98 R99 R100 R101 R102 R103 R104 R105 R106 R107 R108 R109 R110 R111 R112 R113 R114 R115: library part 0402
D2 D3 D4 D5 D6 D7 D8 D9 D10 D11 D12 D13 D14 D15 D16 D17 D18 D19 D20 D21 D22 D23 D24 D25 D30 D31 D32 D33 D34 D35 R1 R2 R3 R5 R6 R7 R8 R9 R10 R11 R12 R13 R14 R15 R16 R17 R18 R19 R20 R21 R22 R23 R24 R25 R26 R27 R28 R29 R30 R31 R32 R33 R34 R35 R36 R37 R38 R39 R40 R41 R42 R43 R44 R45 R46 R47 R48 R49 R50 R51 R52 R53 R54 R55 R56 R57 R58 R59 R61 R62 R63 R64 R65 R66 R67 R68 R69 R70 R71 R72 R73 R74 R75 R76 R77 R78 R79 R81 R82 R83 R84: library part R0402
D26 D27 D28 D29: library part LED0805
F1: library part FUSE
H1 H2 H3 H4: library part 5,5
IC1 IC2: library part DUB-R-PDSO-G8
LED1: library part SMARTLED-TTW
Q1 Q3: library part SOT-23
R4: library part CT/CN0805
SV2: library part FE15-2
TP1: library part B1,27
U1 U3 U4 U5 U6 U8: library part SOP65P640X120-14N
U2: library part PWP24_4P68X2P4
U7: library part PZ100
U9: library part CP56
U10: library part LQFP64
U11: library part SO8
U$5: library part USB-MICRO-MOLEX-105017-0001
XTAL1: library part TXC_7M-16.000MAAJ-T
Y1: library part CRYSTAL_3225

## Nets (pads, with @x,y where several pads share a name; then routed paths per layer and width w, separated by ;. In a path a pad name is that pad's centre, name@x,y a point inside that pad or via, vN(x,y) a via of type N, cw(c..) or ccw(c..) an arc to the next point about the centre after c; other vN are vias at no path point)
3.3V: C1.1 C2.1 C5.- C6.1 C9.1 C10.1 F1.2 IC1.8 IC2.8 R3.2 U2.2 U2.3 U2.10 U2.11 | length 265.7
  Top w16: IC2.8 8135.65,3730.48 C10.1@8135.65,3880.48 ; IC1.8 9198.65,3060.48 C9.1@9199.65,3059.48
5V_IN: F1.1 R4.1 U$5.1 X1.1@6670.21,2877.56
+1V2: C4.1 C13.1 C14.1 C15.1 C16.1 C17.1 C18.1 C19.1 C20.1 SV2.28 U2.14 U2.15 U2.16 U7.21 U7.30 U7.32 U7.61 U7.88 U7.99 | length 549.3
  Top w16: C20.1@7157.65,3688.48 7227.65,3688.48 7243.65,3705.48 7698.65,3705.48 C19.1@7698.65,3706.48
+1V8: C54.1 C56.1 C61.1 C62.1 C63.1 U9.G8 U10.12 U10.37 U10.49 U10.64
+3V3: C3.1 C7.1 C21.1 C22.1 C23.1 C24.1 C25.1 C26.1 C46.1 C52.1 C53.1 C55.1 C57.1 C60.1 C64.1 C65.1 C66.1 C67.1 C68.1 D27.A D28.A FB1.1 FB2.1 IC2.1 Q1.2 Q3.2 R1.2 R2.2 R7.2 R96.1 R97.2 R98.1 R99.1 R100.1 R101.1 R109.1 R111.2 R112.2 R113.2 R115.2 SV2.30 U1.4 U2.21 U2.22 U2.23 U3.4 U4.4 U5.4 U6.4 U7.6 U7.13 U7.28 U7.85 U7.96 U8.4 U9.C6 U9.D3 U9.H6 U10.20 U10.31 U10.42 U10.50 U10.56 U11.6 U11.8 | length 544.6
  Top w16: C26.1@7155.65,3513.48 7231.65,3513.48 7242.65,3524.48 C21.1@7540.65,3524.48 ; C7.1@7978.65,3355.48 7979.65,3355.48 IC2.1@8133.65,3355.48
+5V: SV2.29
A0_3V3: R8.1 R9.2 U3.3
A0_BUFFERED: U3.1 U3.2 U7.42
A0_IN: D4.2 R62.2 X1.7
A1_3V3: R10.1 R11.2 U3.5
A1_BUFFERED: U3.6 U3.7 U7.49
A1_IN: D5.2 R73.2 X1.8
A2_3V3: R12.1 R13.2 U3.10
A2_BUFFERED: U3.8 U3.9 U7.51
A2_IN: D6.2 R61.2 X1.9
A3_3V3: R14.1 R15.2 U3.12
A3_BUFFERED: U3.13 U3.14 U7.52
A3_IN: D30.2 R84.2 X1.10
A4_3V3: R16.1 R17.2 U4.3
A4_BUFFERED: U4.1 U4.2 U7.54
A4_IN: D10.2 R63.2 X1.11
A5_3V3: R18.1 R19.2 U4.5
A5_BUFFERED: U4.6 U4.7 U7.55
A5_IN: D11.2 R72.2 X1.12
A6_3V3: R20.1 R21.2 U4.10
A6_BUFFERED: U4.8 U4.9 U7.56
A6_IN: D12.2 R74.2 X1.13
A7_3V3: R22.1 R23.2 U4.12
A7_BUFFERED: U4.13 U4.14 U7.43
A7_IN: D33.2 R83.2 SV2.1 X1.14
A8_3V3: R24.1 R25.2 U5.3
A8_BUFFERED: U5.1 U5.2 U7.57
A8_IN: D13.2 R64.2 X1.15
A9_3V3: R26.1 R27.2 U5.5
A9_BUFFERED: U5.6 U5.7 U7.48
A9_IN: D14.2 R71.2 X1.16
A10_3V3: R28.1 R29.2 U5.10
A10_BUFFERED: U5.8 U5.9 U7.50
A10_IN: D15.2 R75.2 X1.17
A11_3V3: R30.1 R31.2 U5.12
A11_BUFFERED: U5.13 U5.14 U7.53
A11_IN: D32.2 R82.2 X1.18
A12_3V3: R32.1 R33.2 U6.3
A12_BUFFERED: U6.1 U6.2 U7.40
A12_IN: D16.2 R65.2 X1.19
A13_3V3: R34.1 R35.2 U6.5
A13_BUFFERED: U6.6 U6.7 U7.41
A13_IN: D17.2 R70.2 X1.20
A14_3V3: R36.1 R37.2 U6.10
A14_BUFFERED: U6.8 U6.9 U7.44
A14_IN: D18.2 R76.2 X1.21
A15_3V3: R38.1 R39.2 U6.12
A15_BUFFERED: U6.13 U6.14 U7.45
A15_IN: D31.2 R81.2 X1.22
CAN1H: D25.1 IC1.7 R5.2 X1.3 | length 283.6
  Top w16: IC1.7 9134.65,2913.48 9248.65,2913.48 ; R5.2@9248.65,2858.48 9248.65,2913.48 ; D25.1@9248.65,2959.48 9246.65,2956.48 9246.65,2955.48 9248.65,2953.48 9248.65,2913.48
CAN1L: D9.2 IC1.6 R5.1 X1.4 | length 210.2
  Top w16: IC1.6 9195.65,2860.48 9197.65,2858.48 9196.65,2857.48 D9.2
CAN1RX: IC1.2 U7.63
CAN1TX: IC1.3 U7.62
CAN2H: D8.1 IC2.7 R6.2 X1.5 | length 257.2
  Top w16: IC2.7 8235.65,3730.48 8235.65,3879.48 8340.65,3879.48 R6.2
CAN2L: D7.2 IC2.6 R6.1 X1.6 | length 331.8
  Top w16: IC2.6 8395.65,3790.48 8395.65,3930.48 ; R6.1@8340.65,3930.48 8395.65,3930.48 ; D7.2@8444.65,3928.48 8442.65,3930.48 8395.65,3930.48
CAN2RX: IC2.2 U7.92
CAN2TX: IC2.3 U7.91
CGND: R59.2
CHIP_RESET: U2.1 U2.6 U2.7 U2.9 U2.12 U2.13 U2.24
CPLD_TCK: U9.K10 U10.52
CPLD_TDI: U9.J10 U10.53
CPLD_TDO: U9.A6 U10.57
CPLD_TMS: U9.K9 U10.58
D0_3V3: R43.1 R44.2 U1.3
D0_BUFFERED: U1.1 U1.2 U7.1
D0_IN: D19.2 R66.2 X1.23
D1_3V3: R45.1 R46.2 U1.5
D1_BUFFERED: U1.6 U1.7 U7.2
D1_IN: D20.2 R40.2 X1.24
D2_3V3: R47.1 R48.2 U1.10
D2_BUFFERED: U1.8 U1.9 U7.5
D2_IN: D21.2 R67.2 X1.25
D3_3V3: R49.1 R50.2 U1.12
D3_BUFFERED: U1.13 U1.14 U7.8
D3_IN: D34.2 R79.2 X1.26
D4_3V3: R51.1 R52.2 U8.3
D4_BUFFERED: U7.9 U8.1 U8.2
D4_IN: D22.2 R68.2 X1.27
D5_3V3: R53.1 R54.2 U8.5
D5_BUFFERED: U7.10 U8.6 U8.7
D5_IN: D23.2 R69.2 X1.28
D6_3V3: R55.1 R56.2 U8.10
D6_BUFFERED: U7.12 U8.8 U8.9
D6_IN: D24.2 R77.2 X1.29
D7_3V3: R57.1 R58.2 U8.12
D7_BUFFERED: U7.18 U8.13 U8.14
D7_IN: D35.2 R78.2 SV2.2 X1.30
DM: R41.2 U10.7
DP: R42.2 U10.8
FTDI_TCK: U9.H10 U10.16
FTDI_TDI: Q1.3 R115.1 U9.K8 U10.17
FTDI_TDO: U9.H8 U10.18
FTDI_TMS: U9.H5 U10.19
GND: C1.2 C2.2 C3.2 C4.2 C5.+ C6.2 C7.2 C8.2 C9.2 C10.2 C11.2 C12.2 C13.2 C14.2 C15.2 C16.2 C17.2 C18.2 C19.2 C20.2 C21.2 C22.2 C23.2 C24.2 C25.2 C26.2 C29.2 C30.2 C31.2 C32.2 C33.2 C34.2 C35.2 C36.2 C37.2 C38.2 C39.2 C40.2 C41.2 C42.2 C43.2 C44.2 C45.2 C46.2 C47.2 C48.2 C49.2 C50.2 C51.2 C52.2 C53.2 C54.2 C55.2 C56.2 C57.2 C58.2 C59.2 C60.2 C61.2 C62.2 C63.2 C64.2 C65.2 C66.2 C67.2 C68.2 C69.2 C70.2 C71.2 C72.2 D2.1 D3.1 D4.1 D5.1 D6.1 D7.1 D8.2 D9.1 D10.1 D11.1 D12.1 D13.1 D14.1 D15.1 D16.1 D17.1 D18.1 D19.1 D20.1 D21.1 D22.1 D23.1 D24.1 D25.2 D29.C D30.1 D31.1 D32.1 D33.1 D34.1 D35.1 IC1.4 IC1.5 IC2.4 IC2.5 LED1.C@1 R4.2 R9.1 R11.1 R13.1 R15.1 R17.1 R19.1 R21.1 R23.1 R25.1 R27.1 R29.1 R31.1 R33.1 R35.1 R37.1 R39.1 R44.1 R46.1 R48.1 R50.1 R52.1 R54.1 R56.1 R58.1 R59.1 R102.1 R110.1 U1.11 U3.11 U4.11 U5.11 U6.11 U7.7 U7.17 U7.20 U7.29 U7.33 U7.59 U7.72 U7.86 U7.87 U7.100 U8.11 U9.C7 U9.F8 U9.H4 U10.1 U10.5 U10.10 U10.11 U10.13 U10.15 U10.25 U10.35 U10.47 U10.51 U11.5 U$5.5 X1.2 Y1.P$2 Y1.P$4 | length 934.9
  Top w16: C26.2@7155.65,3587.48 7230.65,3587.48 7242.65,3575.48 C21.2@7540.65,3575.48 ; C20.2@7157.65,3763.48 7236.65,3763.48 7243.65,3756.48 7698.65,3756.48 C19.2
GPIOH0: U9.K1 U10.26
GPIOH1: U9.J1 U10.27
GPIOH3: U9.F3 U10.29
GPIOL0: U9.K5 U10.21
GPIOL1: U9.H3 U10.22
GPIOL2: U9.K3 U10.23
GPIOL3: U9.K2 U10.24
JTAG_SEL: Q3.3
MCU_RESET: R89.1
MCU_RTCK: R86.2
MCU_TCK: R90.1
MCU_TDI: R93.1
MCU_TDO: R91.1
MCU_TMS: R95.1
MCU_TRSTN: R94.1
N$1: R1.1 R2.1 U2.5 U2.18 U2.19
N$2: LED1.A@1 R3.1
N$3: C58.1 C69.1 FB1.2 U10.9
N$4: C59.1 C70.1 FB2.2 U10.4
N$5: R110.2 U10.6
N$6: R109.2 U10.14
N$7: C72.1 U10.2 Y1.P$3
N$12: R7.1 U2.8
N$13: TP1.TP
N$14: C27.2 C28.1 U7.15
N$15: C27.1 U7.14 XTAL1.1
N$16: C71.1 U10.3 Y1.P$1
N$17: C28.2 U7.16 XTAL1.3
N$18: R111.1 U10.63 U11.1
N$19: R112.1 U10.62 U11.2
N$20: D2.2 R41.1 U$5.2
N$21: D3.2 R42.1 U$5.3
N$22: D26.A R96.2
N$23: R108.2 U10.61 U11.3
N$24: R108.1 R113.1 U11.4
N$25: R106.1 U10.54
N$26: R107.1 U10.55
N$27: R103.1 U10.38
N$28: R104.1 U10.39
N$29: R95.2 U9.A3 U9.C1
N$30: Q1.1 R114.2
N$31: R94.2 U9.A2
N$32: R93.2 U9.B1
N$33: R92.2 U9.A1
N$34: R91.2 U9.C4
N$35: R90.2 U9.A10 U9.C5 U9.C8
N$36: R89.2 U9.B10
N$37: D29.A R114.1
N$38: R105.2 U10.40
N$39: R105.1 U10.41
N$40: R86.1 U9.D10
N$42: D27.C R106.2
N$43: D28.C R107.2
N$45: C11.1 R12.2 R61.1
N$46: C12.1 R8.2 R62.1
N$47: C29.1 R16.2 R63.1
N$48: C30.1 R24.2 R64.1
N$49: C31.1 R32.2 R65.1
N$50: C32.1 R43.2 R66.1
N$51: C8.1 R51.2 R68.1
N$52: C33.1 R53.2 R69.1
N$53: C35.1 R40.1 R45.2
N$54: C36.1 R34.2 R70.1
N$55: C37.1 R26.2 R71.1
N$56: C38.1 R18.2 R72.1
N$57: C39.1 R10.2 R73.1
N$58: C40.1 R20.2 R74.1
N$59: C41.1 R28.2 R75.1
N$60: C42.1 R36.2 R76.1
N$61: C34.1 R47.2 R67.1
N$62: C43.1 R55.2 R77.1
N$63: C44.1 R57.2 R78.1
N$64: C45.1 R49.2 R79.1
N$65: C47.1 R38.2 R81.1
N$66: C48.1 R30.2 R82.1
N$67: C49.1 R22.2 R83.1
N$68: C50.1 R14.2 R84.1
POWER_EN: D26.C U9.G3 U10.60
POWERGOOD: C51.1 R97.1 U9.F10
PWR_DET: U9.H1 U10.28
SCI1_RX: R103.2
SCI1_TX: R104.2
SPARE0: R98.2 U9.F1 U10.30
SPARE1: R99.2 U9.E3 U10.32
SPARE2: R100.2 U9.E1 U10.33
SPARE3: R101.2 U9.D1 U10.34
SUSPEED: U9.G1 U10.36
T_DIS: Q3.1 R92.1 R102.2
VCCIO_5: U7.60
pads on no net: H1.1 H2.1 H3.1 H4.1 IC1.1 LED1.A LED1.C SV2.3 SV2.4 SV2.5 SV2.6 SV2.7 SV2.8 SV2.9 SV2.10 SV2.11 SV2.12 SV2.13 SV2.14 SV2.15 SV2.16 SV2.17 SV2.18 SV2.19 SV2.20 SV2.21 SV2.22 SV2.23 SV2.24 SV2.25 SV2.26 SV2.27 U2.4 U2.17 U2.20 U2.EPAD U2.V U2.V_1 U2.V_2 U2.V_3 U2.V_4 U2.V_5 U2.V_6 U2.V_7 U2.V_8 U2.V_9 U2.V_10 U2.V_11 U2.V_12 U2.V_13 U2.V_14 U7.3 U7.4 U7.11 U7.19 U7.22 U7.23 U7.24 U7.25 U7.26 U7.27 U7.31 U7.34 U7.35 U7.36 U7.37 U7.38 U7.39 U7.46 U7.47 U7.58 U7.64 U7.65 U7.66 U7.67 U7.68 U7.69 U7.70 U7.71 U7.73 U7.74 U7.75 U7.76 U7.77 U7.78 U7.79 U7.80 U7.81 U7.82 U7.83 U7.84 U7.89 U7.90 U7.93 U7.94 U7.95 U7.97 U7.98 U9.A4 U9.A5 U9.A7 U9.A8 U9.A9 U9.C3 U9.C10 U9.D8 U9.E8 U9.E10 U9.G10 U9.H7 U9.K4 U9.K6 U9.K7 U10.43 U10.44 U10.45 U10.46 U10.48 U10.59 U11.7 U$5.4 U$5.P$1 U$5.P$2 U$5.P$3 U$5.P$4 X1.1@6823.65,2020.55 X1.1@6823.65,3301.12 X1.31 X1.32 X1.33 X1.34 X1.35 X1.36 X1.37 XTAL1.2 XTAL1.4

## Keep-outs
Keep-Out Layer:
  lines w0: 6178.65,4085.48 6180.65,1000 9759.65,1000.48 9757.65,4086.48 6178.65,4085.48

## Silkscreen, mask and mechanical layers (free items; w line width, h text height)
Dimension:
  lines w0: 6178.65,4085.48 6180.65,1000 9759.65,1000.48 9757.65,4086.48 6178.65,4085.48
Unrouted:
  drawing of 493 lines, arcs and shapes, not listed

## Text inside footprints (layer, text, board x,y; h text height)
SV2: Top Overlay "30" at 9306.65,1935.48 h77.5 r270; Top Overlay "1" at 9631.65,3315.48 h77.5 r270
TP1: tTest ">TP_SIGNAL_NAME" at 4946.65,5825.48 h62
U1: Bottom Overlay "*" at 7276.65,2968.48 h77.5 r180; bDocu "*" at 7276.65,2968.48 h77.5 r180
U2: Top Overlay "*" at 7633.65,1916.48 h77.5 r90; tDocu "*" at 7633.65,1916.48 h77.5 r90
U3: Bottom Overlay "*" at 7637.65,2122.48 h77.5 r270; bDocu "*" at 7637.65,2122.48 h77.5 r270
U4: Bottom Overlay "*" at 7845.65,2418.48 h77.5 r90; bDocu "*" at 7845.65,2418.48 h77.5 r90
U5: Bottom Overlay "*" at 8185.65,2428.48 h77.5 r90; bDocu "*" at 8185.65,2428.48 h77.5 r90
U6: Bottom Overlay "*" at 8575.65,2418.48 h77.5 r90; bDocu "*" at 8575.65,2418.48 h77.5 r90
U7: Top Overlay "*" at 7882.65,3120.48 h77.5; tDocu "*" at 7882.65,3120.48 h77.5
U8: Bottom Overlay "*" at 7280.65,2567.48 h77.5 r180; bDocu "*" at 7280.65,2567.48 h77.5 r180
U$5: Reference "CONNECTOR FRONT INTERFACE" at 8232.16,973.54 h18.6; Reference "PCB EDGE" at 8325.65,1001.09 h18.6